# EAGLE board CT_schematic (EAGLE 7.6.0)

Size 100 x 80 mm. Coordinates in mm from the lower left corner, seen from the top.
Outline: 0,0 100,0 100,80 0,80 0,0
Copper layers (1*16): Top 0.035mm / dielectric 1.5mm / Bottom 0.035mm
Design rules "default": minimum track width 10mil, minimum drill 24mil, track to track 8mil, track to pad 8mil, pad to pad 8mil, via to via 8mil, smd to smd 8mil, copper to edge 40mil, drill to drill 8mil, minimum pad ring 10mil, minimum via ring 8mil, stop-mask expansion 4mil, vias tented up to drill 0mil, thermal gap 10mil

## Footprints (pad centres in the part's own frame; a part is rotated, then mirrored left to right if it is on the bottom)
C0603 = smd 0.8 x 0.8: 1 -0.762,0; 2 0.762,0
C0402 = smd 0.5 x 0.5: 1 -0.508,0; 2 0.508,0
C1206 = smd 1.3 x 1.6: 1 -1.524,0; 2 1.524,0
C1210 = smd 1.2 x 2.5: 1 -1.524,0; 2 1.524,0
EXV-9H = smd 3.505 x 1.676: 1 -2.857,0; 2 2.857,0
L0603 = smd 0.8 x 0.8: 1 -0.762,0; 2 0.762,0
PJ-037B_PACKAGE = drill 3.7 square: 1 12,0 | drill 3.2 square: 2 6,0
R0603 = smd 0.8 x 0.8: 1 -0.762,0; 2 0.762,0
LQFP48 = smd 0.3 x 1.2: 1 -2.75,-4.25; 2 -2.25,-4.25; 3 -1.75,-4.25; 4 -1.25,-4.25; 5 -0.75,-4.25; 6 -0.25,-4.25; 7 0.25,-4.25; 8 0.75,-4.25; 9 1.25,-4.25; 10 1.75,-4.25; 11 2.25,-4.25; 12 2.75,-4.25; 25 2.75,4.25; 26 2.25,4.25; 27 1.75,4.25; 28 1.25,4.25; 29 0.75,4.25; 30 0.25,4.25; 31 -0.25,4.25; 32 -0.75,4.25; 33 -1.25,4.25; 34 -1.75,4.25; 35 -2.25,4.25; 36 -2.75,4.25 | smd 1.2 x 0.3: 13 4.25,-2.75; 14 4.25,-2.25; 15 4.25,-1.75; 16 4.25,-1.25; 17 4.25,-0.75; 18 4.25,-0.25; 19 4.25,0.25; 20 4.25,0.75; 21 4.25,1.25; 22 4.25,1.75; 23 4.25,2.25; 24 4.25,2.75; 37 -4.25,2.75; 38 -4.25,2.25; 39 -4.25,1.75; 40 -4.25,1.25; 41 -4.25,0.75; 42 -4.25,0.25; 43 -4.25,-0.25; 44 -4.25,-0.75; 45 -4.25,-1.25; 46 -4.25,-1.75; 47 -4.25,-2.25; 48 -4.25,-2.75
WSON-6 = smd 0.4 x 0.6: 1 -1,-1.4; 2 0,-1.4; 3 1,-1.4; 4 1,1.4; 5 0,1.4; 6 -1,1.4 | drill 0.2 pad 0.3: P$1 0.95,0; P$2 -0.95,0; P$3 0,-0.5; P$4 0,0.5 | smd 2.4 x 1.5: PAD 0,0
TDFN-8/6MM = smd 0.3 x 0.75: 1 0,0; 2 0.5,0; 3 1,0; 4 1.5,0; 5 1.5,3; 6 1,3; 7 0.5,3; 8 0,3
ABLS-25.000MHZ-B2F-T = smd 5.6 x 2.8: 1 -3.81,0; 2 5.69,0
ASEK = smd 1.4 x 1: 1 -1.1,-0.8; 2 1.1,-0.8; 3 1.1,0.8; 4 -1.1,0.8
WSON-8 = smd 0.3 x 0.6: 1 -0.75,0; 2 0.05,0; 3 0.85,0; 4 1.65,0; 5 1.65,3.8; 6 0.85,3.8; 7 0.05,3.8; 8 -0.75,3.8 | smd 3 x 2.6: PAD 0.45,1.9
SON-6 = smd 0.55 x 0.3: 1 -0.355,0.5 | smd 0.52 x 0.3: 2 -0.37,0; 3 -0.37,-0.5; 4 0.37,-0.5; 5 0.37,0; 6 0.37,0.5
SW_4-1437565-2 = smd 1.4 x 2.1: 1 -2.23,4.55; 2 -2.23,-4.55; 3 2.23,4.55; 4 2.23,-4.55
LGM67K-G1J2-24-Z = smd 0.8 x 1.4: A -2,0; C 0,0
NC7SZ125M5X = smd 1.3 x 0.7: 1 -1.3,0.95; 2 -1.3,0; 3 -1.3,-0.95; 4 1.3,-0.95; 5 1.3,0.95
DUMMY_PACKAGE_103 = drill 0.3: 1 0,-1; 2 1.5,-1; 3 3,-1

## Placement (x,y rotation side)
C1  1e-07  [C0603]  -38.1,52.07 0 top  (outside the outline)
C2  1e-07  [C0603]  -41.91,52.07 0 top  (outside the outline)
C3  1e-07  [C0603]  -45.72,52.07 0 top  (outside the outline)
C4  1e-07  [C0603]  -49.53,52.07 0 top  (outside the outline)
C5  4.7e-06  [C0603]  -34.29,52.07 0 top  (outside the outline)
C6  1e-07  [C0603]  -53.34,52.07 0 top  (outside the outline)
C7  1e-08  [C0603]  -57.15,52.07 0 top  (outside the outline)
C8  1e-06  [C0603]  -15.24,57.15 0 top  (outside the outline)
C9  1e-11  [C0402]  -15.24,62.23 0 top  (outside the outline)
C10  1e-11  [C0402]  -19.05,62.23 0 top  (outside the outline)
C11  1e-08  [C0402]  -22.86,62.23 0 top  (outside the outline)
C12  1e-08  [C0402]  -26.67,62.23 0 top  (outside the outline)
C13  1e-08  [C0402]  -30.48,62.23 0 top  (outside the outline)
C14  1e-08  [C0402]  -34.29,62.23 0 top  (outside the outline)
C15  1e-05  [C1206]  -35.56,44.45 0 top  (outside the outline)
C16  1e-05  [C1210]  -29.21,45.72 0 top  (outside the outline)
C17  1e-07  [C0402]  -38.1,62.23 0 top  (outside the outline)
C18  0.0001  [EXV-9H]  -17.78,38.1 0 top  (outside the outline)
C19  0.0001  [EXV-9H]  -29.21,38.1 0 top  (outside the outline)
C20  1e-08  [C0402]  -41.91,62.23 0 top  (outside the outline)
F1  240.0  [L0603]  -19.05,57.15 0 top  (outside the outline)
J1  PJ-037B  [PJ-037B_PACKAGE]  -27.94,7.62 0 top  (outside the outline)
R1  10000.0  [R0603]  -15.24,52.07 0 top  (outside the outline)
R2  1000.0  [R0603]  -22.86,57.15 0 top  (outside the outline)
R3  1600.5  [R0603]  -26.67,57.15 0 top  (outside the outline)
R4  4700.0  [R0603]  -30.48,57.15 0 top  (outside the outline)
R5  2200.0  [R0603]  -34.29,57.15 0 top  (outside the outline)
R6  2200.0  [R0603]  -38.1,57.15 0 top  (outside the outline)
R7  2200.0  [R0603]  -41.91,57.15 0 top  (outside the outline)
R8  2200.0  [R0603]  -45.72,57.15 0 top  (outside the outline)
R9  10000.0  [R0603]  -20.32,52.07 0 top  (outside the outline)
R10  100000.0  [R0603]  -46.99,44.45 0 top  (outside the outline)
R11  2231.0  [R0603]  -49.53,57.15 0 top  (outside the outline)
R12  1000.0  [R0603]  -53.34,57.15 0 top  (outside the outline)
R13  10000.0  [R0603]  -25.4,52.07 0 top  (outside the outline)
R14  10000.0  [R0603]  -30.48,52.07 0 top  (outside the outline)
R15  9100.0  [R0603]  -57.15,57.15 0 top  (outside the outline)
R16  680000.0  [R0603]  -52.07,44.45 0 top  (outside the outline)
R17  120000.0  [R0603]  -57.15,44.45 0 top  (outside the outline)
U1  STM32L151CBT6A  [LQFP48]  -25.4,20.32 0 top  (outside the outline)
U2  HDC1080DMBR  [WSON-6]  -36.83,29.21 0 top  (outside the outline)
U3  24AA08T-I/MNY  [TDFN-8/6MM]  -41.91,19.05 0 top  (outside the outline)
U4  ABLS-25.000MHZ-B2F-T  [ABLS-25.000MHZ-B2F-T]  -48.26,38.1 0 top  (outside the outline)
U5  ASEK-32.768KHz-ECST  [ASEK]  -57.15,29.21 0 top  (outside the outline)
U6  LP3878SDX-ADJ/NOPB  [WSON-8]  -30.48,27.94 0 top  (outside the outline)
U7  TPS3895ADRYR  [SON-6]  -50.8,60.96 0 top  (outside the outline)
U8  4-1437565-2  [SW_4-1437565-2]  -44.45,6.35 0 top  (outside the outline)
U9  Q65110A2395  [LGM67K-G1J2-24-Z]  -17.78,45.72 0 top  (outside the outline)
U10  nc7sz125m5x  [NC7SZ125M5X]  -40.64,44.45 0 top  (outside the outline)
U11  Dummy  [DUMMY_PACKAGE_103]  -48.26,62.23 0 top  (outside the outline)

## Library data of the parts
C1-C20 F1 J1 R1-R17 U1-U11 = circuit_tree

## Nets
CLK_CRYSTAL_U1_5: C9.1 U1.5 U4.1
CLK_CRYSTAL_U1_6: C10.1 U1.6 U4.2
CLK_U1_3: U1.3 U5.3
GND: C1.2 C2.2 C3.2 C4.2 C5.2 C6.2 C7.2 C8.2 C9.2 C10.2 C11.2 C12.2 C13.2 C14.2 C15.2 C16.2 C17.2 C18.2 C19.2 C20.2 J1.2 R2.2 R9.2 R12.2 R15.2 R17.2 U1.8 U1.23 U1.35 U1.47 U2.2 U2.PAD U3.4 U3.7 U5.2 U6.3 U6.PAD U7.2 U9.C U10.1 U10.3 U11.1
NET_U1_1: C6.1 U1.1
NET_U1_7: R4.1 U1.7 U10.4
NET_U1_9: C7.1 C8.1 F1.1 U1.9
NET_U1_21: R7.1 U1.21 U3.6
NET_U1_22: R8.1 U1.22 U3.5
NET_U1_42: R5.1 U1.42 U2.6
NET_U1_43: R6.1 U1.43 U2.1
NET_U1_44: R9.1 U1.44
NET_U1_45: R3.1 U1.45 U9.A
NET_U1_46: R1.1 U1.46 U8.3 U8.4
NET_U6_1: C14.1 U6.1
NET_U6_6: R11.2 R12.1 U6.6
NET_U6_8: R10.1 U6.8
NET_U7_1: R14.1 R15.1 U7.1
NET_U7_3: R16.2 R17.1 U7.3
NET_U7_4: R13.1 U7.4 U10.2
NET_U8_1: R2.1 U8.1 U8.2
PROC_TIM10_CH1: U1.16 U11.2
PROC_TIM11_CH1: U1.17 U11.3
VCC_S1_9V1: C15.1 C18.1 C19.1 J1.1 R10.2 U6.4
VCC_TIER1_3V3: C1.1 C2.1 C3.1 C4.1 C5.1 C11.1 C12.1 C13.1 C16.1 C17.1 C20.1 F1.2 R1.2 R3.2 R4.2 R5.2 R6.2 R7.2 R8.2 R11.1 R13.2 R14.2 R16.1 U1.24 U1.36 U1.48 U2.5 U3.8 U5.4 U6.5 U7.6 U10.5

## Tracks (layer width: path | path; a pad name or v marks a point on that pad's centre or on a via)
CLK_CRYSTAL_U1_5  (2 unrouted)
CLK_CRYSTAL_U1_6  (2 unrouted)
CLK_U1_3  (1 unrouted)
GND  (41 unrouted)
NET_U1_1  (1 unrouted)
NET_U1_7  (2 unrouted)
NET_U1_9  (3 unrouted)
NET_U1_21  (2 unrouted)
NET_U1_22  (2 unrouted)
NET_U1_42  (2 unrouted)
NET_U1_43  (2 unrouted)
NET_U1_44  (1 unrouted)
NET_U1_45  (2 unrouted)
NET_U1_46  (3 unrouted)
NET_U6_1  (1 unrouted)
NET_U6_6  (2 unrouted)
NET_U6_8  (1 unrouted)
NET_U7_1  (2 unrouted)
NET_U7_3  (2 unrouted)
NET_U7_4  (2 unrouted)
NET_U8_1  (2 unrouted)
PROC_TIM10_CH1  (1 unrouted)
PROC_TIM11_CH1  (1 unrouted)
VCC_S1_9V1  (5 unrouted)
VCC_TIER1_3V3  (31 unrouted)